# Altium PCB 数码管.PcbDoc
Units mil, origin at the board's own origin, x right, y up, seen from the top; angles counter-clockwise.
Board outline 3920 x 3920 mil, 2 copper layers (Top Layer, Bottom Layer); 65 components, 108 nets, 267 pads, 16 vias.
Unrouted connection lines stored in the file: 126.
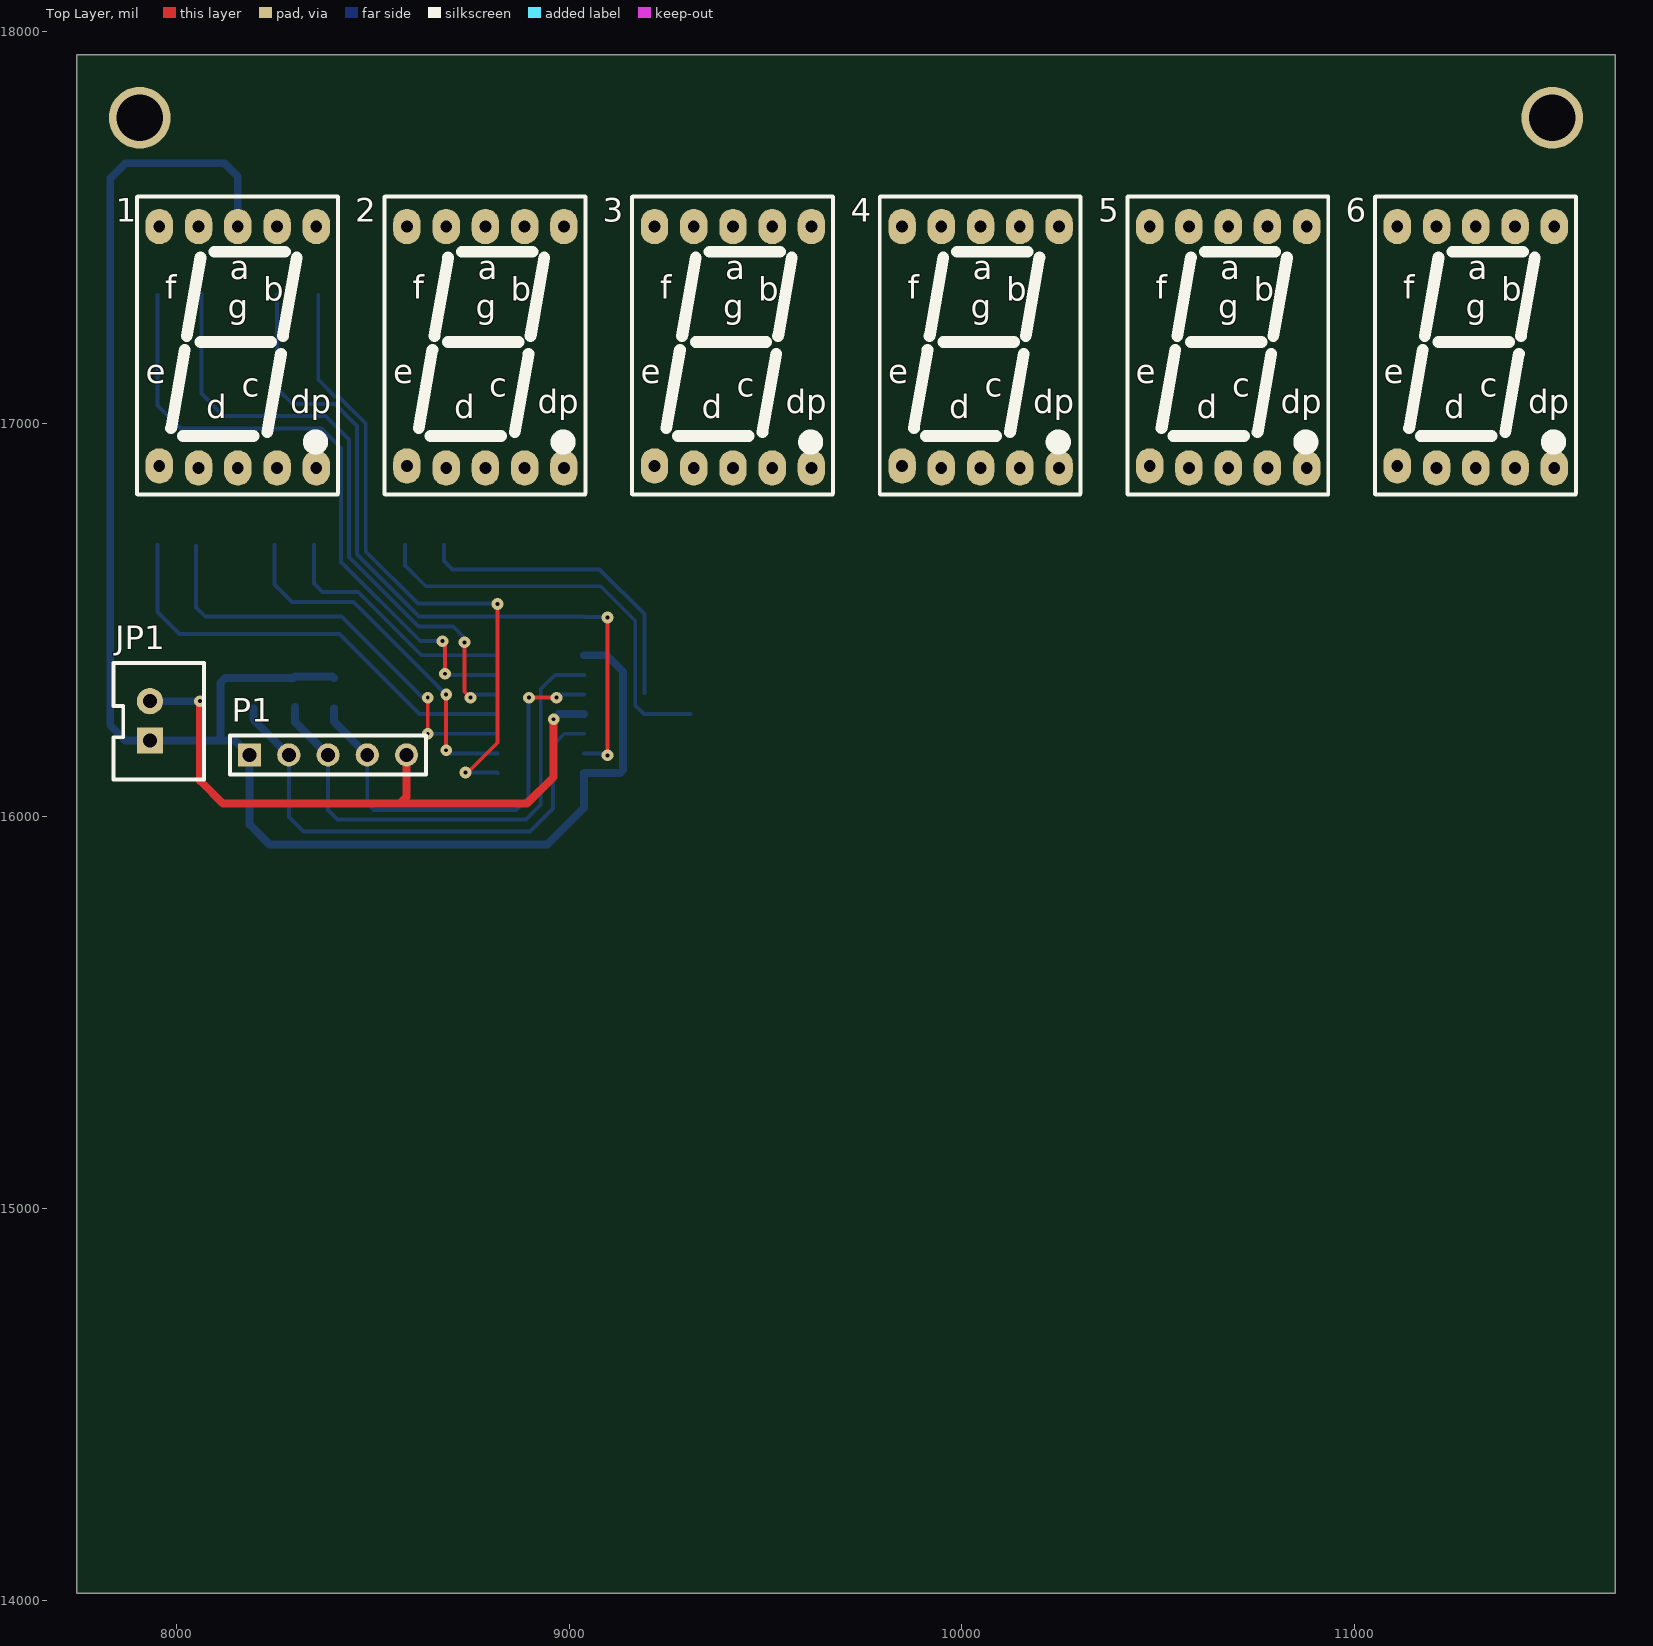
[diagram p0: Top Layer view]
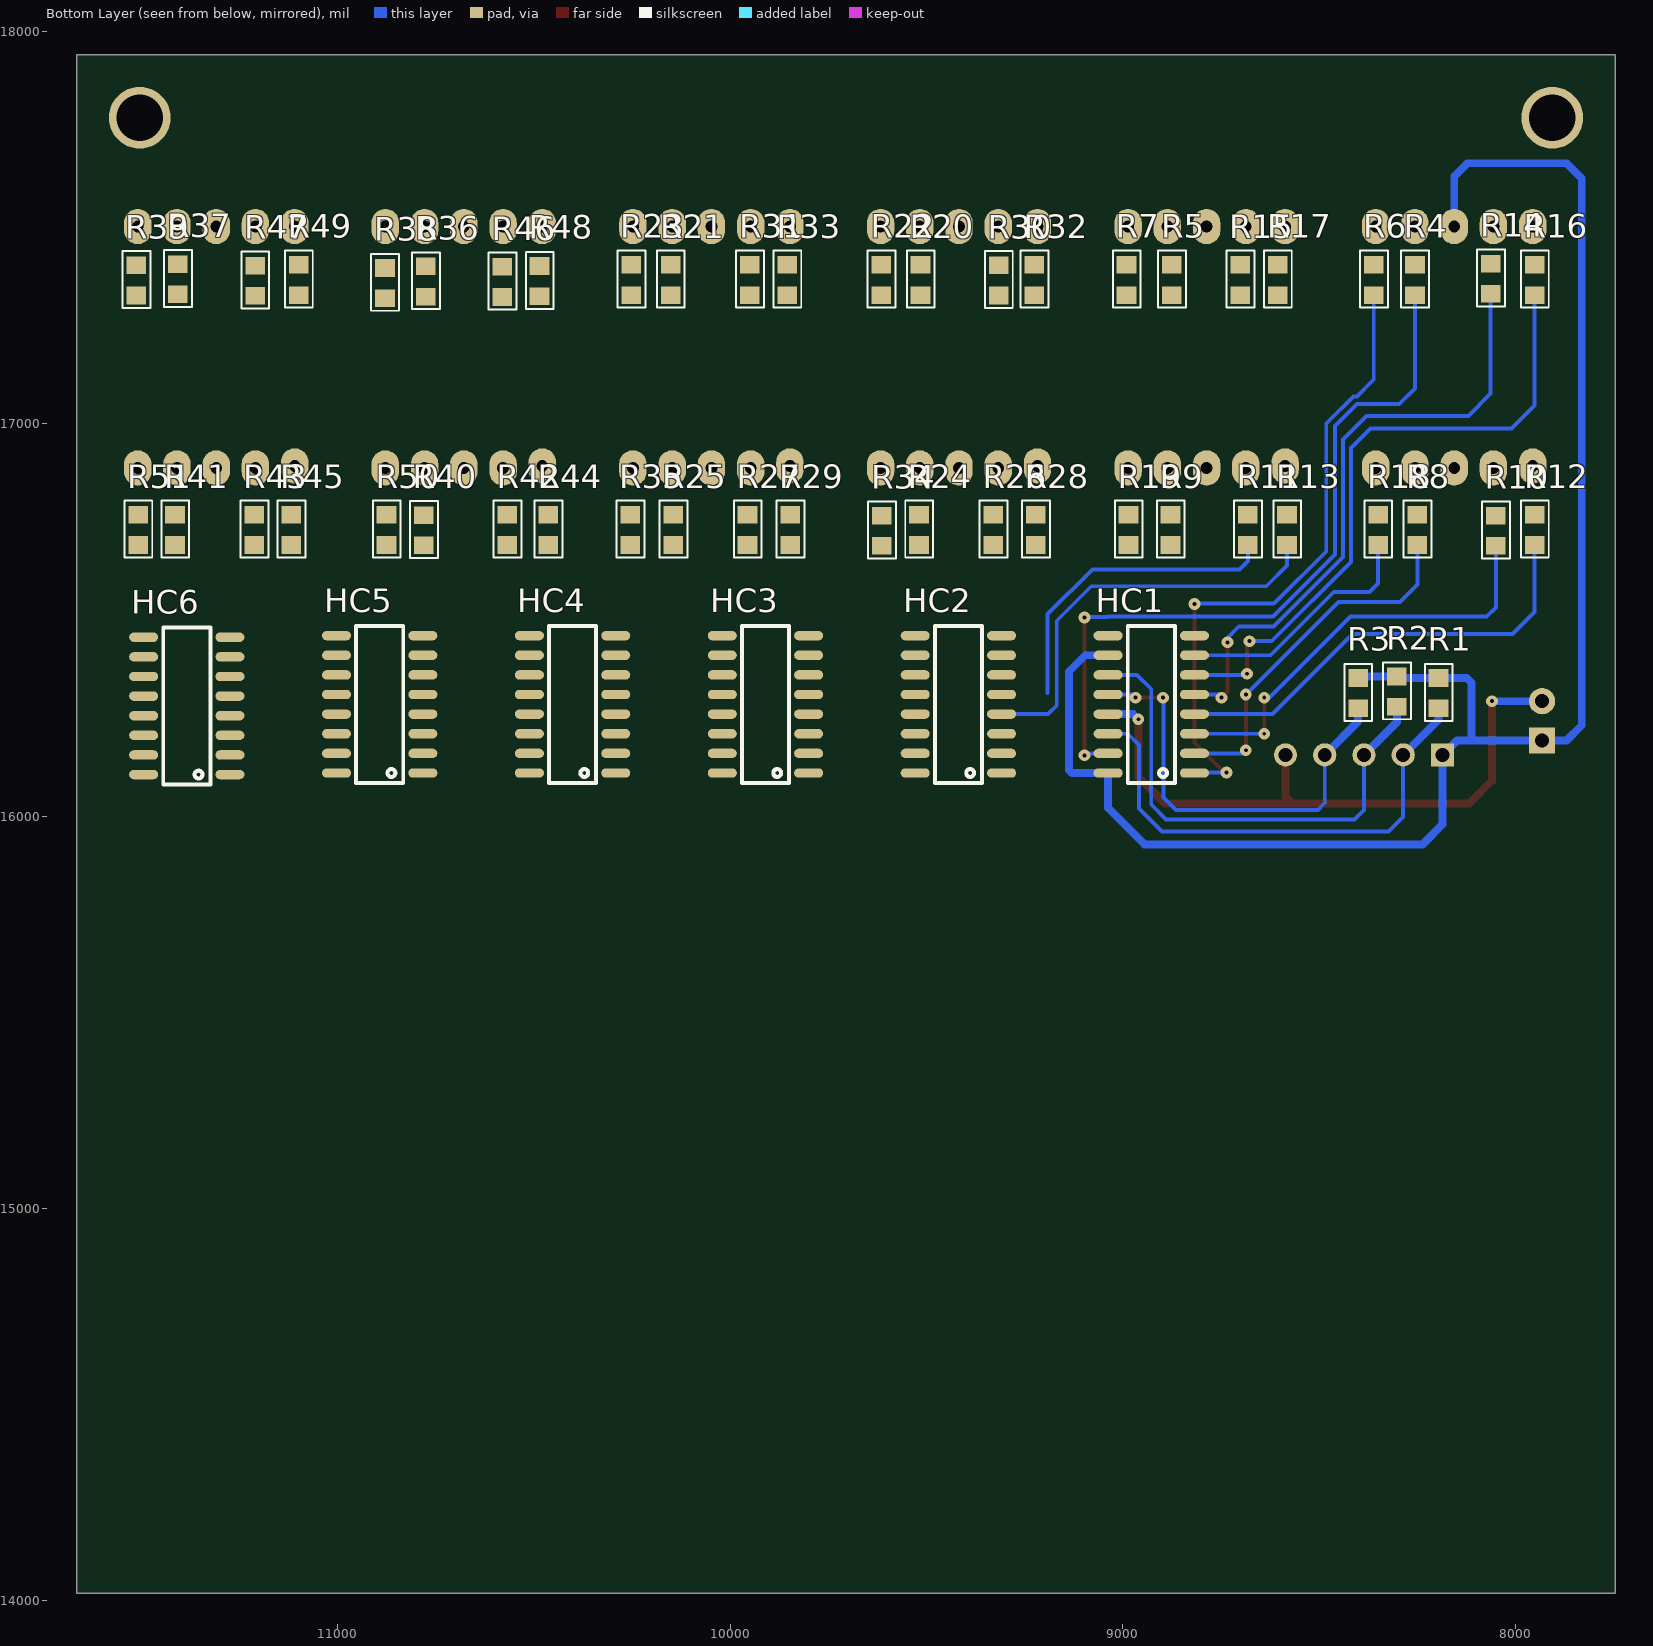
[diagram p1: Bottom Layer view, seen from below]

## Layer stack, top to bottom
Top Solder: solder mask 0.4, Solder Resist, Dk 3.5
Top Layer: signal copper 1.4
Dielectric 1: dielectric 12.6, FR-4, Dk 4.8
Bottom Layer: signal copper 1.4
Bottom Solder: solder mask 0.4, Solder Resist, Dk 3.5

## Board outline
7745,14020 7745,17940 11665,17940 11665,14020

## Design rules (kind name [scope] priority, off if disabled: settings)
Clearance [All] p1: gap=10
PolygonConnect [All] p1: connectstyle=Relief reliefconductorwidth=10 reliefentries=4 polygonreliefangle="90 Angle" airgapwidth=10
RoutingVias [All] p1: holewidth=10 width=30 viastyle="Through Hole" minholewidth=5 minwidth=20 maxholewidth=30 maxwidth=50
SolderMaskExpansion [All] p1: expansion=4
Width [All] p1: maxlimit=30 minlimit=10 preferedwidth=20 minimp=50.000000 maximp=50.000000 favimp=50.000000
30 further rules are at their usual default settings.

## Classes and differential pairs
component class 数码管: 1 2 3 4 5 6 HC1 HC2 HC3 HC4 HC5 HC6 JP1

## Components (designator, comment, footprint, x,y, rotation, side; value= is the part's Value field where it differs from the comment)
1 "DPY_RED" 7SEG_8 8155,17195 r0 top
2 "DPY_RED" 7SEG_8 8786,17195 r0 top
3 "DPY_RED" 7SEG_8 9417,17195 r0 top
4 "DPY_RED" 7SEG_8 10048,17195 r0 top
5 "DPY_RED" 7SEG_8 10679,17195 r0 top
6 "DPY_RED" 7SEG_8 11310,17195 r0 top
HC1 "74HC595" SOP_16 8817,16110 r0 bottom
HC2 "74HC595" SOP_16 9308.6,16110 r0 bottom
HC3 "74HC595" SOP_16 9800.2,16110 r0 bottom
HC4 "74HC595" SOP_16 10291.8,16110 r0 bottom
HC5 "74HC595" SOP_16 10783.4,16110 r0 bottom
HC6 "74HC595" SOP_16 11275,16106 r0 bottom
JP1 "HDR-1X2" XH2.54-LI-2P 7931,16243 r90 top
P1 "H1X5" H2.54_1X5 8385,16156 r0 top
R1 "RES" RES[0805] 8195,16352 r270 bottom
R2 "RES" RES[0805] 8301,16356 r270 bottom
R3 "RES" RES[0805] 8400,16352 r270 bottom
R4 "RES" RES[0805] 8255,17405 r270 bottom
R5 "RES" RES[0805] 8875,17405 r270 bottom
R6 "RES" RES[0805] 8360,17405 r270 bottom
R7 "RES" RES[0805] 8990,17405 r270 bottom
R8 "RES" RES[0805] 8249,16768 r270 bottom
R9 "RES" RES[0805] 8878,16768 r270 bottom
R10 "RES" RES[0805] 8049,16766 r270 bottom
R11 "RES" RES[0805] 8681,16768 r270 bottom
R12 "RES" RES[0805] 7950,16768 r270 bottom
R13 "RES" RES[0805] 8581,16768 r270 bottom
R14 "RES" RES[0805] 8062,17408 r270 bottom
R15 "RES" RES[0805] 8700,17405 r270 bottom
R16 "RES" RES[0805] 7950,17405 r270 bottom
R17 "RES" RES[0805] 8605,17405 r270 bottom
R18 "RES" RES[0805] 8349,16768 r270 bottom
R19 "RES" RES[0805] 8985,16768 r270 bottom
R20 "RES" RES[0805] 9515,17405 r270 bottom
R21 "RES" RES[0805] 10152,17405 r270 bottom
R22 "RES" RES[0805] 9615,17405 r270 bottom
R23 "RES" RES[0805] 10252,17405 r270 bottom
R24 "RES" RES[0805] 9519,16768 r270 bottom
R25 "RES" RES[0805] 10145,16768 r270 bottom
R26 "RES" RES[0805] 9330,16768 r270 bottom
R27 "RES" RES[0805] 9956,16768 r270 bottom
R28 "RES" RES[0805] 9221,16768 r270 bottom
R29 "RES" RES[0805] 9847,16768 r270 bottom
R30 "RES" RES[0805] 9316,17404 r270 bottom
R31 "RES" RES[0805] 9950,17405 r270 bottom
R32 "RES" RES[0805] 9225,17405 r270 bottom
R33 "RES" RES[0805] 9855,17405 r270 bottom
R34 "RES" RES[0805] 9614,16766 r270 bottom
R35 "RES" RES[0805] 10255,16768 r270 bottom
R36 "RES" RES[0805] 10776,17401 r270 bottom
R37 "RES" RES[0805] 11408,17407 r270 bottom
R38 "RES" RES[0805] 10880,17397 r270 bottom
R39 "RES" RES[0805] 11514,17404 r270 bottom
R40 "RES" RES[0805] 10781,16767 r270 bottom
R41 "RES" RES[0805] 11415,16768 r270 bottom
R42 "RES" RES[0805] 10568,16768 r270 bottom
R43 "RES" RES[0805] 11213,16768 r270 bottom
R44 "RES" RES[0805] 10464,16768 r270 bottom
R45 "RES" RES[0805] 11119,16768 r270 bottom
R46 "RES" RES[0805] 10581,17400 r270 bottom
R47 "RES" RES[0805] 11211,17403 r270 bottom
R48 "RES" RES[0805] 10486,17402 r270 bottom
R49 "RES" RES[0805] 11100,17405 r270 bottom
R50 "RES" RES[0805] 10876,16768 r270 bottom
R51 "RES" RES[0805] 11509,16768 r270 bottom

## Footprints (in the part's own frame and the unit in brackets; to place one, negate y for a bottom-side part, rotate by r counter-clockwise, add the part's x,y. Pads: shape width x height; smd on the part's side, far side on the other; paste and mask are expansions set on the pad)
7SEG_8 [mil]
  oval 70x90 hole 30: 1(-200,307.5) 2(-100,307.5) 3(0,307.5) 4(100,307.5) 5(200,307.5) 6(-200,-302.5) 7(-100,-307.5) 8(0,-307.5) 9(100,-307.5) 10(200,-307.5)
  silkscreen extent -257,-376 255,384, body extent -246,-337 242,336
H2.54_1X5 [mm]
  rect 1.5x1.5 hole 0.9: 1(-5.08,0)
  round 1.5 hole 0.9: 2(-2.54,0) 3(0,0) 4(2.54,0) 5(5.08,0)
  silkscreen extent -6.35,-1.27 6.35,1.27, body extent -6.35,-1.27 6.35,1.27, height 8.54
RES[0805] [mm]
  rect 1.14x1.27 smd: 1(0,0) 2(1.956,0)
  silkscreen extent -0.91,-0.89 2.77,0.91, body extent -0.01,-0.63 1.99,0.63, height 0.55
SOP_16 [mil]
  oval 74x24 smd: 1(0,0) 2(0,-50) 3(0,-100) 4(0,-150) 5(0,-200) 6(0,-250) 7(0,-300) 8(0,-350) 9(220,-350) 10(220,-300) 11(220,-250) 12(220,-200) 13(220,-150) 14(220,-100) 15(220,-50) 16(220,0)
  silkscreen extent 50,-375 170,25, body extent -5,-367 223,19, height 69
XH2.54-LI-2P [mm] "接插件，2P  淘宝ID:黄晶宝石   店铺网址:https://shop463601444.taobao.com"
  rect 1.7x1.7 hole 0.9: 1(-1.27,0)
  round 1.7 hole 0.9: 2(1.27,0)
  silkscreen extent -3.81,-3.51 3.74,2.37, body extent -3.77,-3.3 3.77,2.4, height 7.05

## Part data
JP1: library part "Header 2", "2P接插件"

## Free pads (board coordinates)
  round 157.48 hole 118.11: 0(7905,17780) 1(11505,17780)

## Via types
v1: diameter 30, hole 10, Top Layer to Bottom Layer, 16 vias

## Nets (pads, with @x,y where several pads share a name; then routed paths per layer and width w, separated by ;. In a path a pad name is that pad's centre, name@x,y a point inside that pad or via, vN(x,y) a via of type N, cw(c..) or ccw(c..) an arc to the next point about the centre after c; other vN are vias at no path point)
END: HC1.13 HC2.13 HC3.13 HC4.13 HC5.13 HC6.13 JP1.2 P1.5 | length 1644.6
  Top Layer w20: v1(8059,16293) 8059,16090 8117,16032 8568,16032 ; P1.5 8585,16049 8568,16032 ; v1(8960,16247) 8960,16100 8892,16032 8568,16032
  Bottom Layer w20: JP1.2 v1(8059,16293) ; v1(8960,16247) 8973,16260 HC1.13
ENG: HC1.8 HC2.8 HC3.8 HC4.8 HC5.8 HC6.8
Net1_1: 1.1 R16.1
Net1_2: 1.2 R14.1
Net1_4: 1.4 R4.1
Net1_5: 1.5 R6.1
Net1_6: 1.6 R12.1
Net1_7: 1.7 R10.1
Net1_9: 1.9 R8.1
Net1_10: 1.10 R18.1
Net2_1: 2.1 R17.1
Net2_2: 2.2 R15.1
Net2_4: 2.4 R5.1
Net2_5: 2.5 R7.1
Net2_6: 2.6 R13.1
Net2_7: 2.7 R11.1
Net2_9: 2.9 R9.1
Net2_10: 2.10 R19.1
Net3_1: 3.1 R32.1
Net3_2: 3.2 R30.1
Net3_4: 3.4 R20.1
Net3_5: 3.5 R22.1
Net3_6: 3.6 R28.1
Net3_7: 3.7 R26.1
Net3_9: 3.9 R24.1
Net3_10: 3.10 R34.1
Net4_1: 4.1 R33.1
Net4_2: 4.2 R31.1
Net4_4: 4.4 R21.1
Net4_5: 4.5 R23.1
Net4_6: 4.6 R29.1
Net4_7: 4.7 R27.1
Net4_9: 4.9 R25.1
Net4_10: 4.10 R35.1
Net5_1: 5.1 R48.1
Net5_2: 5.2 R46.1
Net5_4: 5.4 R36.1
Net5_5: 5.5 R38.1
Net5_6: 5.6 R44.1
Net5_7: 5.7 R42.1
Net5_9: 5.9 R40.1
Net5_10: 5.10 R50.1
Net6_1: 6.1 R49.1
Net6_2: 6.2 R47.1
Net6_4: 6.4 R37.1
Net6_5: 6.5 R39.1
Net6_6: 6.6 R45.1
Net6_7: 6.7 R43.1
Net6_9: 6.9 R41.1
Net6_10: 6.10 R51.1
Q10: HC1.15 R4.2 | length 1926.4
  Top Layer w10: v1(9097,16155) v1(9097,16506)
  Bottom Layer w10: R4.2 8255,17090 8295,17050 8403,17050 8459,16994 8459,16667.28 8617.28,16509 9037,16509 9038,16508 9095,16508 v1(9097,16506) ; HC1.15 9092,16160 v1(9097,16155)
Q11: HC1.1 R6.2 | length 1663.5
  Top Layer w10: v1(8735,16111) 8730,16106 8736,16106 8817,16187 v1(8817,16541)
  Bottom Layer w10: R6.2 8360,17113 8403,17070 8411.28,17070 8481,17000.28 8481,16675 8614,16542 8816,16542 v1(8817,16541) ; v1(8735,16111) 8816,16111 HC1.1
Q12: HC1.2 R8.2 | length 930.3
  Top Layer w10: v1(8686,16168) v1(8686,16310)
  Bottom Layer w10: R8.2 8249,16590 8293,16546 8450,16546 v1(8686,16310) ; v1(8686,16168) 8694,16160 HC1.2
Q13: HC1.3 R10.2 | length 1112.3
  Top Layer w10: v1(8639,16210) v1(8639,16302)
  Bottom Layer w10: R10.2 8049,16532 8072,16509 8419,16509 8626,16302 v1(8639,16302) ; v1(8639,16210) HC1.3
Q14: HC1.4 R12.2 | length 1145.7
  Bottom Layer w10: R12.2 7950,16520 8006,16464 8414,16464 8618,16260 HC1.4
Q15: HC1.5 R14.2 | length 1589.3
  Top Layer w10: v1(8733,16443) 8733,16317 v1(8748,16302)
  Bottom Layer w10: R14.2 8062,17077 8119,17020 8378,17020 8438,16960 8438,16660 8615,16483 8704,16483 8733,16454 v1(8733,16443) ; v1(8748,16302) 8756,16310 HC1.5
Q16: HC1.6 R16.2 | length 1655.3
  Top Layer w10: v1(8677,16446) 8680,16446 8683,16449 v1(8683,16363)
  Bottom Layer w10: R16.2 7950,17047 8009,16988 8368,16988 8418,16938 8418,16648 8620,16446 v1(8677,16446) ; v1(8683,16363) 8686,16360 HC1.6
Q17: HC1.7 R18.2 | length 641.8
  Bottom Layer w10: R18.2 8349,16593 8371,16571 8462,16571 8623,16410 HC1.7
Q18: HC1.9 HC2.14
Q20: HC2.15 R5.2
Q21: HC2.1 R7.2
Q22: HC2.2 R9.2
Q23: HC2.3 R11.2 | length 807.9
  Bottom Layer w10: R11.2 8681,16650 8702,16629 9077,16629 9191,16515 9191,16314
Q24: HC2.4 R13.2 | length 1063.1
  Bottom Layer w10: R13.2 8581,16639 8634,16586 9080,16586 9168,16498 9168,16282 9190,16260 HC2.4
Q25: HC2.5 R15.2
Q26: HC2.6 R17.2
Q27: HC2.7 R19.2
Q28: HC2.9 HC3.14
Q30: HC3.15 R20.2
Q31: HC3.1 R22.2
Q32: HC3.2 R24.2
Q33: HC3.3 R26.2
Q34: HC3.4 R28.2
Q35: HC3.5 R30.2
Q36: HC3.6 R32.2
Q37: HC3.7 R34.2
Q38: HC3.9 HC4.14
Q40: HC4.15 R21.2
Q41: HC4.1 R23.2
Q42: HC4.2 R25.2
Q43: HC4.3 R27.2
Q44: HC4.4 R29.2
Q45: HC4.5 R31.2
Q46: HC4.6 R33.2
Q47: HC4.7 R35.2
Q48: HC4.9 HC5.14
Q50: HC5.15 R36.2
Q51: HC5.1 R38.2
Q52: HC5.2 R40.2
Q53: HC5.3 R42.2
Q54: HC5.4 R44.2
Q55: HC5.5 R46.2
Q56: HC5.6 R48.2
Q57: HC5.7 R50.2
Q58: HC5.9 HC6.14
Q60: HC6.15 R37.2
Q61: HC6.1 R39.2
Q62: HC6.2 R41.2
Q63: HC6.3 R43.2
Q64: HC6.4 R45.2
Q65: HC6.5 R47.2
Q66: HC6.6 R49.2
Q67: HC6.7 R51.2
Q68: HC6.9
RCK: HC1.12 HC2.12 HC3.12 HC4.12 HC5.12 HC6.12 P1.4 R3.2 | length 1106.2
  Top Layer w10: v1(8897,16302) v1(8967,16302)
  Bottom Layer w10: P1.4 8485,16033 8502,16016 8864,16016 8896,16048 8896,16301 v1(8897,16302) ; v1(8967,16302) 8975,16310 HC1.12
  Bottom Layer w20: R3.2 8400,16241 P1.4
SCK: HC1.11 HC2.11 HC3.11 HC4.11 HC5.11 HC6.11 P1.3 R2.2 | length 1284.4
  Bottom Layer w10: P1.3 8385,16016 8409,15992 8889,15992 8927,16030 8927,16324 8963,16360 HC1.11
  Bottom Layer w20: R2.2 8301,16240 P1.3
SER: HC1.14 P1.2 R1.2 | length 1279.6
  Bottom Layer w10: P1.2 8285,15998 8322,15961 8900,15961 8958,16019 8958,16181 8987,16210 HC1.14
  Bottom Layer w20: R1.2 8195,16246 P1.2
VCC: 1.3 3.3 4.3 5.3 6.3 HC1.10 HC1.16 HC2.10 HC2.16 HC3.10 HC3.16 HC4.10 HC4.16 HC5.10 HC5.16 HC6.10 HC6.16 JP1.1 P1.1 R1.1 R2.1 R3.1 | length 4356.1
  Bottom Layer w20: 1.3 8155,17630 8121,17664 7869,17664 7830,17625 7830,16232 7869,16193 JP1.1 8114,16193 ; R3.1 8396,16356 R2.1 8297,16352 R1.1 8123,16352 8111,16340 8111,16196 8114,16193 ; HC1.10 9095,16410 9137,16368 9137,16118 9129,16110 HC1.16 9037,16021 8944,15928 8236,15928 8185,15979 P1.1 8148,16193 8114,16193
pads on no net: 1.8 2.3 2.8 3.8 4.8 5.8 6.8

## Text inside footprints (layer, text, board x,y; h text height)
1: Top Overlay "f" at 7970,17318.5 h60; Top Overlay "b" at 8220,17313.5 h60; Top Overlay "g" at 8130,17268.5 h60; Top Overlay "a" at 8135,17368.5 h60; Top Overlay "d" at 8075,17013.5 h60; Top Overlay "e" at 7920,17103.5 h60; Top Overlay "dp" at 8289,17026.5 h60; Top Overlay "c" at 8165,17068.5 h60
2: Top Overlay "f" at 8601,17318.5 h60; Top Overlay "b" at 8851,17313.5 h60; Top Overlay "g" at 8761,17268.5 h60; Top Overlay "a" at 8766,17368.5 h60; Top Overlay "d" at 8706,17013.5 h60; Top Overlay "e" at 8551,17103.5 h60; Top Overlay "dp" at 8920,17026.5 h60; Top Overlay "c" at 8796,17068.5 h60
3: Top Overlay "f" at 9232,17318.5 h60; Top Overlay "b" at 9482,17313.5 h60; Top Overlay "g" at 9392,17268.5 h60; Top Overlay "a" at 9397,17368.5 h60; Top Overlay "d" at 9337,17013.5 h60; Top Overlay "e" at 9182,17103.5 h60; Top Overlay "dp" at 9551,17026.5 h60; Top Overlay "c" at 9427,17068.5 h60
4: Top Overlay "f" at 9863,17318.5 h60; Top Overlay "b" at 10113,17313.5 h60; Top Overlay "g" at 10023,17268.5 h60; Top Overlay "a" at 10028,17368.5 h60; Top Overlay "d" at 9968,17013.5 h60; Top Overlay "e" at 9813,17103.5 h60; Top Overlay "dp" at 10182,17026.5 h60; Top Overlay "c" at 10058,17068.5 h60
5: Top Overlay "f" at 10494,17318.5 h60; Top Overlay "b" at 10744,17313.5 h60; Top Overlay "g" at 10654,17268.5 h60; Top Overlay "a" at 10659,17368.5 h60; Top Overlay "d" at 10599,17013.5 h60; Top Overlay "e" at 10444,17103.5 h60; Top Overlay "dp" at 10813,17026.5 h60; Top Overlay "c" at 10689,17068.5 h60
6: Top Overlay "f" at 11125,17318.5 h60; Top Overlay "b" at 11375,17313.5 h60; Top Overlay "g" at 11285,17268.5 h60; Top Overlay "a" at 11290,17368.5 h60; Top Overlay "d" at 11230,17013.5 h60; Top Overlay "e" at 11075,17103.5 h60; Top Overlay "dp" at 11444,17026.5 h60; Top Overlay "c" at 11320,17068.5 h60